# Altium PCB HGD(v0.1)-20200419.PcbDoc
Units mil, origin at the board's own origin, x right, y up, seen from the top; angles counter-clockwise.
Board outline 2630 x 3365 mil, 2 copper layers (TopLayer, BottomLayer); 74 components, 44 nets, 275 pads, 621 vias.
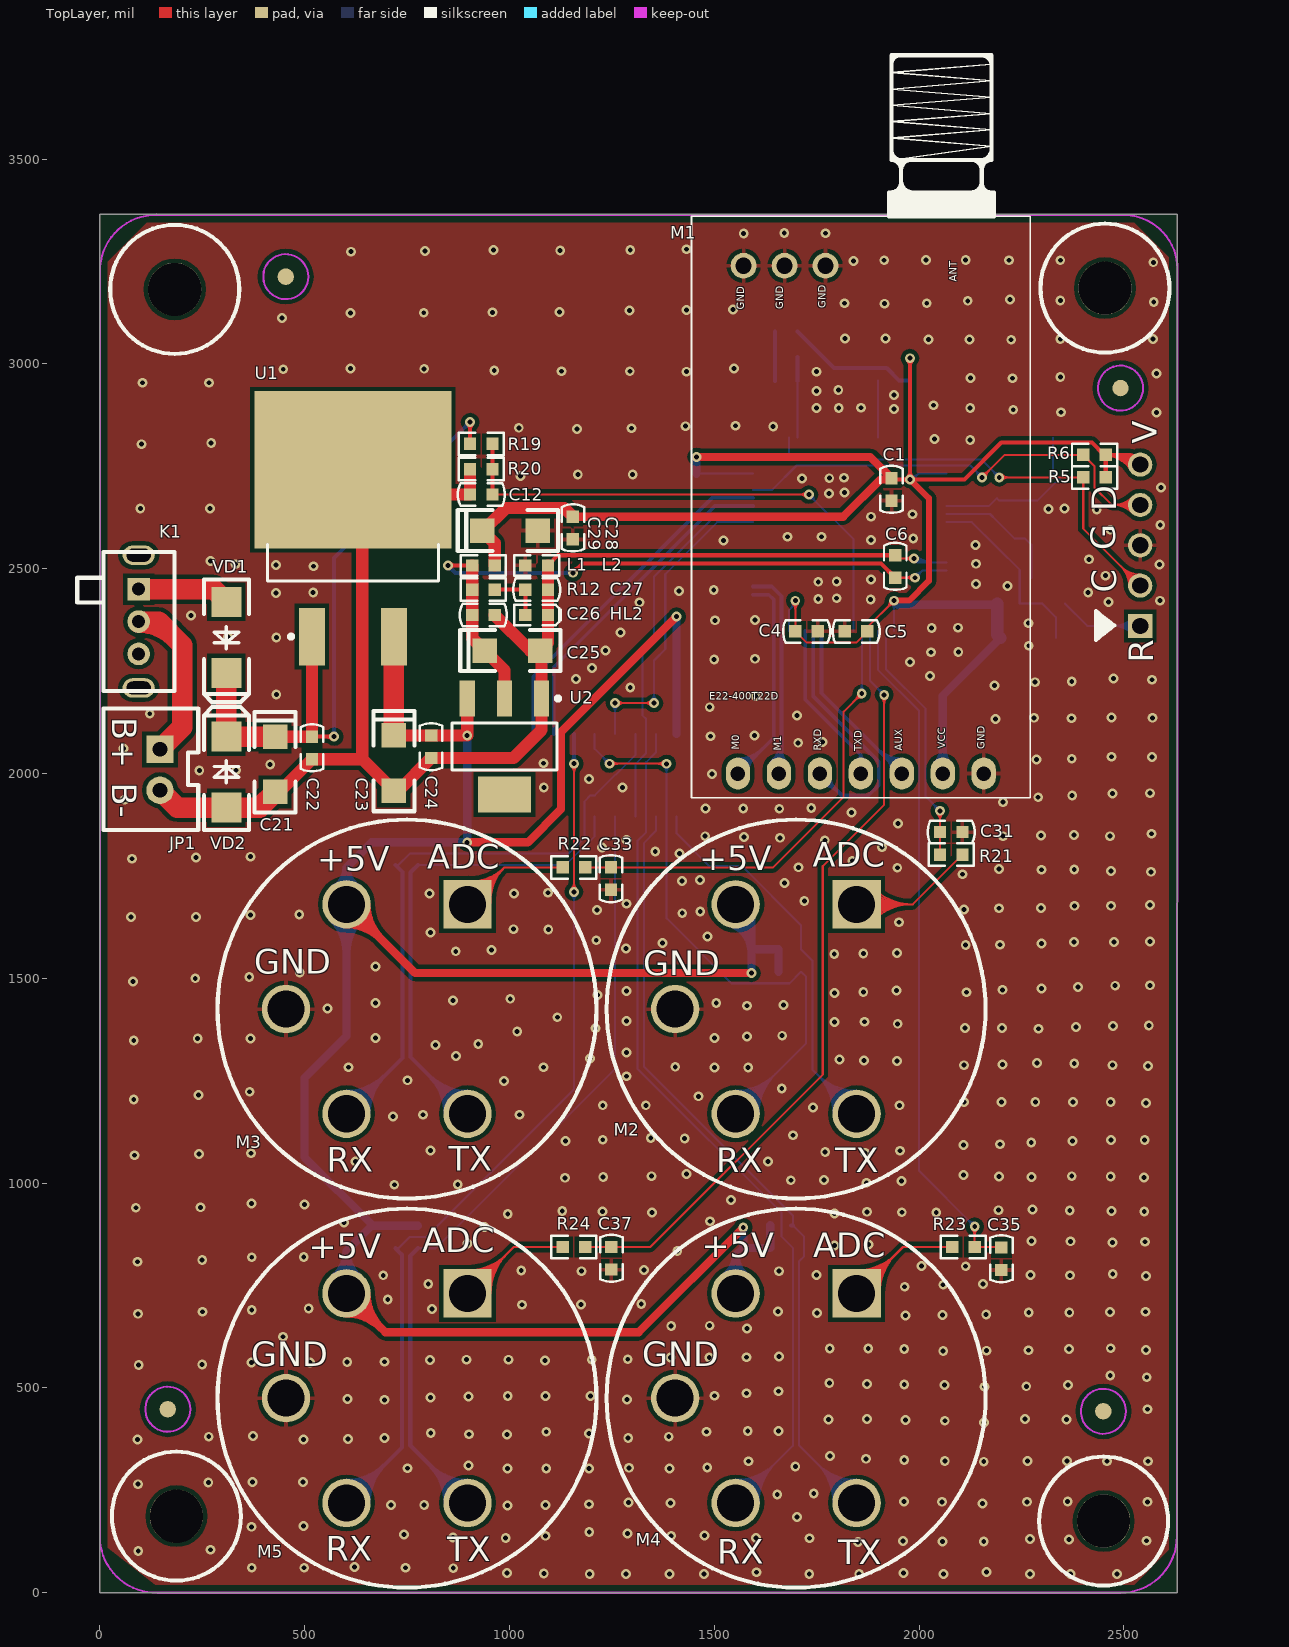
[diagram p0: TopLayer view]
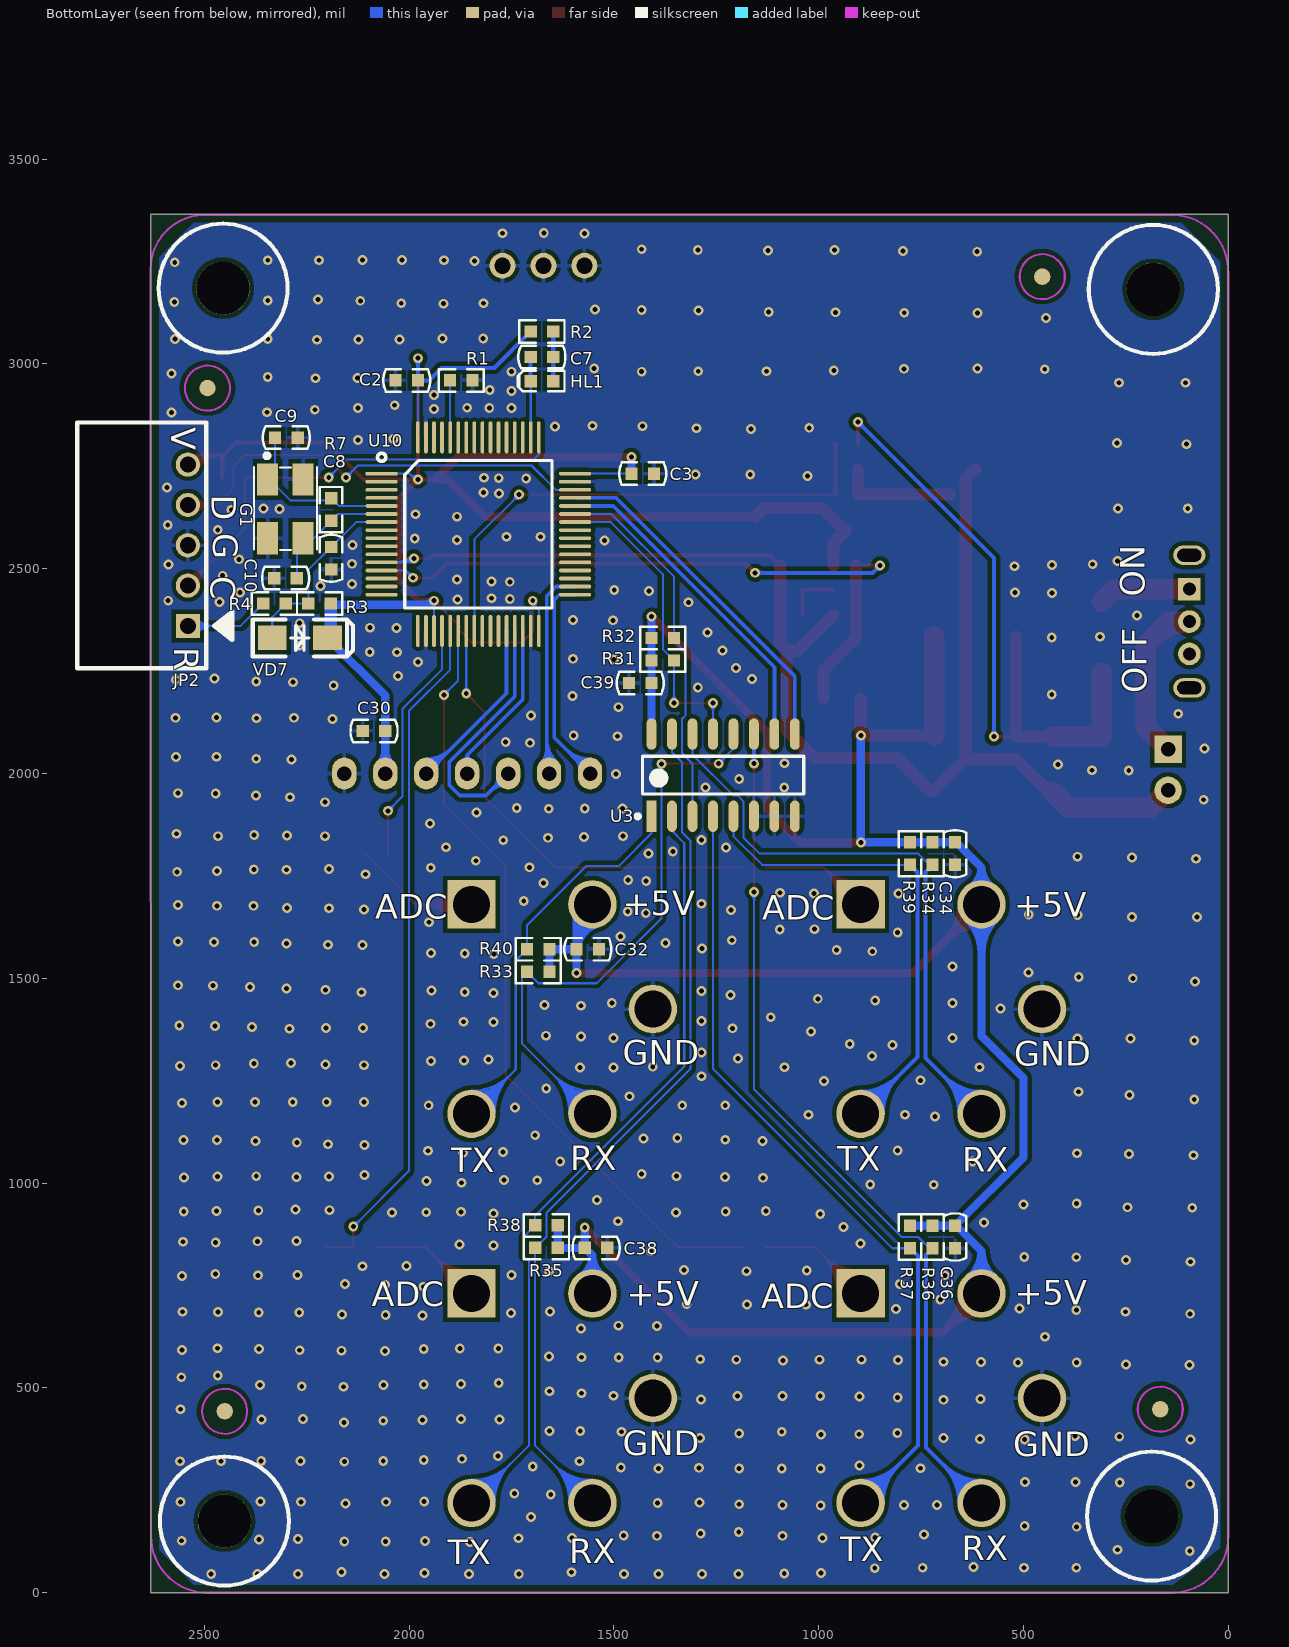
[diagram p1: BottomLayer view, seen from below]

## Layer stack, top to bottom
TopLayer: signal copper 1.4
Dielectric: core 12.6, FR-4, Dk 4.8
BottomLayer: signal copper 1.4

## Board outline
0,0 2630,0 2630,3360 2630,3365 0,3365 0,0

## Design rules (kind name [scope] priority, off if disabled: settings)
Clearance Clearance_2 [InNet('RF_IN') vs InNet('GND')] p1: gap=19.68
Clearance [All] p2: gap=10
Clearance Clearance_1 [All] p3: gap=10
ComponentClearance [All] p1 off: gap=10 collisioncheckmode=3 verticalgap=10 showdistances=FALSE
FabricationTestPointUsage TestPointUsage [All] p1: valid=0 allowmultiple=FALSE
FabricationTestpoint Testpoint [(IsPad And (OnTopLayer Or OnBottomLayer))] p1: side=3 testpointundercomponent=TRUE minsize=40 maxsize=100 preferedsize=60 minholesize=20 maxholesize=40 preferedholesize=32 testpointgrid=1 allowsidetop=TRUE allowsidebottom=TRUE usegrid=TRUE gridtolerance=0.01
HoleSize [All] p1: absolutevalues=TRUE maxlimit=200 minlimit=1 maxpercent=80.000 minpercent=20.000
PolygonConnect [IsVia] p1: connectstyle=Direct reliefconductorwidth=10 reliefentries=4 polygonreliefangle="90 Angle"
PolygonConnect PolygonConnect_via [All] p2 off: connectstyle=Relief reliefconductorwidth=10 reliefentries=4 polygonreliefangle="90 Angle"
RoutingVias [All] p1: holewidth=15.75 width=31.5 viastyle="Through Hole" minholewidth=11.81 minwidth=23.62 maxholewidth=19.68 maxwidth=39.37
ShortCircuit [All] p1 off: allowed=FALSE
SilkscreenOverComponentPads [All] p1: minsilkscreentomaskgap=10
SolderMaskExpansion [All] p1: expansion=4
Width [All] p1: maxlimit=100 minlimit=5 preferedwidth=10
22 further rules are at their usual default settings.

## Components (designator, comment, footprint, x,y, rotation, side; value= is the part's Value field where it differs from the comment)
C1 "100nF/25V/5%" C0603 1933,2666 r90 top
C2 "100nF/25V/5%" C0603 1978,2960 r0 bottom
C3 "100nF/25V/5%" C0603 1457,2732 r180 bottom
C4 "100nF/25V/5%" C0603 1753,2347 r180 top
C5 "100nF/25V/5%" C0603 1819,2347 r0 top
C6 "100nF/25V/5%" C0603 1942,2533 r270 top
C7 "100nF/25V/5%" C0603 1648,3017 r0 bottom
C8 "100nF/25V/5%" C0603 2190,2553 r270 bottom
C9 "20pF/25V/1%" C0603 2272,2820 r0 bottom
C10 "20pF/25V/1%" C0603 2274,2477 r0 bottom
C12 "100nF/25V/5%" C0603 959,2681 r180 top
C21 "10uF/25V/5%" C1206-1 428,2090 r270 top
C22 "100nF/25V/5%" C0603 518,2035 r90 top
C23 "10uF/25V/5%" C1206-1 718,2093 r270 top
C24 "100nF/25V/5%" C0603 809,2038 r90 top
C25 "10uF/25V/5%" C1206-1 940,2300 r0 top
C26 "100nF/25V/5%" C0603 964,2387 r180 top
C27 "100nF/25V/5%" C0603 1039,2449 r0 top
C28 "100nF/25V/5%" C0603 1155,2572 r90 top
C29 "10uF/25V/5%" C1206-1 934,2593 r0 top
C30 "100nF/25V/5%" C0603 2113,2104 r180 bottom
C31 "100nF/25V/5%" C0603 2051,1857 r0 top
C32 "100nF/25V/5%" C0603 1591,1571 r180 bottom
C33 "100nF/25V/5%" C0603 1248,1771 r270 top
C34 "100nF/25V/5%" C0603 667,1832 r270 bottom
C35 "100nF/25V/5%" C0603 2201,843 r270 top
C36 "100nF/25V/5%" C0603 667,896 r270 bottom
C37 "100nF/25V/5%" C0603 1249,844 r270 top
C38 "100nF/25V/5%" C0603 1571,842 r180 bottom
C39 "100nF/25V/5%" C0603 1408,2221 r0 bottom
G1 "16MHz" OSC5032 2345,2718 r270 bottom
HL1 "LED蓝灯" LED0603 1648,2958 r0 bottom
HL2 "LED蓝灯" LED0603 1039,2387 r0 top
JP1 "电池接口" XH2.54-LI-2P 147,2009 r270 top locked
JP2 "SWD" XH2.54-5AW 2540,2262 r90 bottom locked
K1 "电池开关" SK-12D07 95,2371 r270 top locked
L1 "10uH/5%" L0603 909,2508 r0 top
L2 "10uH/5%" L0603 1094,2508 r180 top
M1 "E22-400T22D" E22-400T22D 1558,2000 r90 top locked
M2 "JXM-O2" JXM 1700,1425 r90 top locked
M3 "JXM-CO" JXM 750,1425 r90 top locked
M4 "JXM-H2S" JXM 1700,475 r90 top locked
M5 "JXM-LEL" JXM 750,475 r90 top locked
R1 "10K/5%" R0603 1845,2960 r0 bottom
R2 "2K/5%" R0603 1703,3079 r180 bottom
R3 "10K/5%" R0603 2246,2415 r180 bottom
R4 "1K/5%" R0603 2356,2415 r180 bottom
R5 "10K/5%" R0603 2401,2723 r0 top
R6 "10K/5%" R0603 2401,2778 r0 top
R7 "1M/1%" R0603 2190,2672 r270 bottom
R12 "2K/5%" R0603 909,2449 r0 top
R19 "10M/1%" R0603 904,2805 r0 top
R20 "2.2M/1%" R0603 959,2743 r180 top
R21 "2K/5%" R0603 2051,1802 r0 top
R22 "2K/5%" R0603 1185,1771 r180 top
R23 "2K/5%" R0603 2136,844 r180 top
R24 "2K/5%" R0603 1185,844 r180 top
R31 "10K/5%" R0603 1353,2276 r0 bottom
R32 "10K/5%" R0603 1353,2331 r0 bottom
R33 "10K/5%" R0603 1712,1516 r180 bottom
R34 "10K/5%" R0603 722,1777 r90 bottom
R35 "10K/5%" R0603 1692,842 r180 bottom
R36 "10K/5%" R0603 722,841 r90 bottom
R37 "10K/5%" R0603 777,896 r270 bottom
R38 "10K/5%" R0603 1637,897 r0 bottom
R39 "10K/5%" R0603 777,1832 r270 bottom
R40 "10K/5%" R0603 1657,1571 r0 bottom
U1 "L7805CD2T" D2PAK 618,2588 r90 top locked
U2 "AMS1117-3.3" SOT230P700X180-4N 988,2066 r270 top locked
U3 "74HC4052" SO16_74HC4052 1233,1996 r90 bottom
U10 "STM32F105RCT6" LQFP64 2067,2732 r180 bottom locked
VD1 "1N5408" SMA_DO-214AC 309,2419 r270 top
VD2 "1N4007" SMA_DO-214AC 309,1917 r90 top
VD7 "1N4148" LL-34 2334,2331 r180 bottom

## Footprints (in the part's own frame and the unit in brackets; to place one, negate y for a bottom-side part, rotate by r counter-clockwise, add the part's x,y. Pads: shape width x height; smd on the part's side, far side on the other; paste and mask are expansions set on the pad)
C0603 [mil] "C0603封装电容"
  rect 30x30 smd: 1(0,0) 2(55,0)
  silkscreen extent -30,-28 85,28
C1206-1 [mil] "C1206封装钽电容"
  rect 60x60 smd: 1(0,0) 2(135,0)
  silkscreen extent -60,-50 185,50
D2PAK [mm] "D2-PAK, 3-Pads, Body 9.0x10.6mm (max), IPC Medium Density"
  rect 3.55x1.6 smd: 1(-6.45,2.54) 3(-6.45,-2.54)
  rect 9.75x12.2 smd: 2(3.9,0)
  silkscreen extent -6.57,-5.3 -0.75,5.3, body extent -3,-5.28 6,5.28, height 4.56
E22-400T22D [mm]
  oval 2x1.5 hole 0.9: 1(0,0) 2(0,-2.54) 3(0,-5.08) 4(0,-7.62) 5(0,-10.16) 6(0,-12.7) 7(0,-15.24)
  round 1.6 hole 1: 8(31.49,-5.43) 9(31.49,-2.89) 10(31.49,-0.35)
  silkscreen extent -1.51,-18.12 44.54,2.88
JXM [mm]
  rect 3x3 hole 2.3: 1(6.495,-3.75)
  round 3 hole 2.3: 2(6.495,3.75) 3(0,7.5) 4(-6.495,3.75) 5(-6.495,-3.75)
  silkscreen extent -11.75,-11.75 11.75,11.75
L0603 [mil] "L0603封装电感"
  rect 30x30 smd: 1(0,0) 2(55,0)
  silkscreen extent -28,-25 82,25
LED0603 [mil]
  rect 30x30 smd: A(0,0) K(55,0)
  silkscreen extent -28,-25 87,25
LL-34 [mil] "开关二极管LL-34封装"
  rect 70x60 smd: A(0,0) K(135,0)
  silkscreen extent -48,-45 198,45
LQFP64 [mm]
  rect 2x0.229 smd: 1(0,0)
  oval 2x0.229 smd: 2(0,-0.5) 3(0,-1) 4(0,-1.5) 5(0,-2) 6(0,-2.5) 7(0,-3) 8(0,-3.5) 9(0,-4) 10(0,-4.5) 11(0,-5) 12(0,-5.5) 13(0,-6) 14(0,-6.5) 15(0,-7) 16(0,-7.5) 33(12,-7.5) 34(12,-7) 35(12,-6.5) 36(12,-6) 37(12,-5.5) 38(12,-5) 39(12,-4.5) 40(12,-4) 41(12,-3.5) 42(12,-3) 43(12,-2.5) 44(12,-2) 45(12,-1.5) 46(12,-1) 47(12,-0.5) 48(12,0)
  oval 0.229x2 smd: 17(2.25,-9.75) 18(2.75,-9.75) 19(3.25,-9.75) 20(3.75,-9.75) 21(4.25,-9.75) 22(4.75,-9.75) 23(5.25,-9.75) 24(5.75,-9.75) 25(6.25,-9.75) 26(6.75,-9.75) 27(7.25,-9.75) 28(7.75,-9.75) 29(8.25,-9.75) 30(8.75,-9.75) 31(9.25,-9.75) 32(9.75,-9.75) 49(9.75,2.25) 50(9.25,2.25) 51(8.75,2.25) 52(8.25,2.25) 53(7.75,2.25) 54(7.25,2.25) 55(6.75,2.25) 56(6.25,2.25) 57(5.75,2.25) 58(5.25,2.25) 59(4.75,2.25) 60(4.25,2.25) 61(3.75,2.25) 62(3.25,2.25) 63(2.75,2.25) 64(2.25,2.25)
  silkscreen extent -0.25,-8.32 10.57,1.27
OSC5032 [mm]
  rect 2x1.3 smd: 1(0,0) 2(3.65,0) 3(3.65,2.2) 4(0,2.2)
  silkscreen extent -1.62,-0.84 4.37,3.05
R0603 [mil]
  rect 30x30 smd: 1(0,0) 2(55,0)
  silkscreen extent -28,-28 82,28
SK-12D07 [mm] "3脚2档小型拨动开关"
  oval 1.2x2 hole 0.8 slot 1.5 at 90 deg: 0(-4.115,0) 0(4.115,0)
  rect 1.4x1.4 hole 0.8: 1(-2.007,0)
  round 1.4 hole 0.8: 2(0,0) 3(2.007,0)
  silkscreen extent -4.32,-3.81 4.32,2.21
SMA_DO-214AC [mm]
  rect 1.85x1.85 smd: A(0,0) K(4.4,0)
  silkscreen extent -1.4,-1.4 6.22,1.4
SO16_74HC4052 [mm] "SOP, 16-Leads, Body 10.0x4.0mm (max), Pitch 1.27mm, IPC Medium Density"
  rect 1.95x0.6 smd: 1(-2.55,4.445)
  oval 1.95x0.6 smd: 2(-2.55,3.175) 3(-2.55,1.905) 4(-2.55,0.635) 5(-2.55,-0.635) 6(-2.55,-1.905) 7(-2.55,-3.175) 8(-2.55,-4.445) 9(2.55,-4.445) 10(2.55,-3.175) 11(2.55,-1.905) 12(2.55,-0.635) 13(2.55,0.635) 14(2.55,1.905) 15(2.55,3.175) 16(2.55,4.445)
  silkscreen extent -2.67,-5 1.17,5.42, body extent -2,-5 2,5, height 1.75
SOT230P700X180-4N [mm] "SOT223, 4-Leads, Body 6.5x7.3mm (max), Pitch 2.30mm, IPC Medium Density"
  rect 2.25x0.95 smd: 1(-2.975,2.3) 2(-2.975,0) 3(-2.975,-2.3)
  rect 2.25x3.3 smd: 4(2.975,0)
  silkscreen extent -3.1,-3.25 1.45,3.45, body extent -1.9,-3.25 1.9,3.25, height 1.8
XH2.54-5AW [mm] "XH2.54-5P弯针插座"
  rect 1.5x1.5 hole 1: 1(2.5,0)
  round 1.5 hole 1: 2(5,0) 3(7.5,0) 4(10,0) 5(12.5,0)
  silkscreen extent -0.13,-2.75 15.1,6.86
XH2.54-LI-2P [mm]
  rect 1.7x1.7 hole 0.9: 1(-1.27,0)
  round 1.7 hole 0.9: 2(1.27,0)
  silkscreen extent -3.81,-3.51 3.74,2.37, body extent -3.77,-3.3 3.77,2.4, height 7.05

## Part data
C1 C2 C3 C4 C5 C6 C8: library part CAP-SMD, "电容"
C7 C9 C10 C27 C28 C31 C32 C33 C34 C35 C36 C37 C38 C39: library part CAP, "电容"
C12: library part CAP-SMD
C21 C23 C25: library part "Cap Pol1", "钽电容"
C22 C24 C26 C30: library part Cap, "电容"
C29: library part ELECTRO1, "钽电容"
G1: library part CRYSTAL_4, "两对电极压电晶体"
HL1 HL2: library part 发光二极管, "发光二极管"
JP1: library part XH2.54-2P/PH2.0-2P, "XH2.54-2P/PH2.0-2P插座"
JP2: library part JP_XH2.54-5AW, "XH2.54-5P直插插针"
K1: library part SK-12D07, "SK-12D07：3脚2档小型拨动开关"
L1 L2: library part 电感, "电感"
M1: "E22-400T22D LoRa模块"
M2 M3 M4 M5: library part JXM, "JXM智能气体模组传感器"
R1 R2 R3 R4 R5 R6 R7 R12 R19 R20 R21 R22 R23 R24 R31 R32 R33 R34 R35 R36 R37 R38 R39 R40: library part RES2, "电阻"
U1: "Positive voltage regulator"
U2: library part U_AMS1117, "U_AMS1117稳压芯片"
U10: library part STM32F103RCT6, "MCU"
VD1 VD2 VD7: library part 开关二极管, "开关二极管"

## Free pads (board coordinates)
  round 40 smd far side: 0(166,448) 0(454,3213) 0(2450,443) 0(2492,2941)
  round 129.92 hole 129.92: 0(183,3182) 0(187.01,187.01) 0(2450.68,175.01) 0(2454,3185)
  round 40 smd: 1(166,448) 1(454,3213) 1(2450,443) 1(2492,2941)
  round 100 on Bottom Solder: 2(166,448) 2(454,3213) 2(2450,443) 2(2492,2941)
  round 100 on Top Solder: 3(166,448) 3(454,3213) 3(2450,443) 3(2492,2941)

## Via types
v1: diameter 24, hole 12, TopLayer to BottomLayer, tented both sides, 621 vias

## Nets (pads, with @x,y where several pads share a name; then routed paths per layer and width w, separated by ;. In a path a pad name is that pad's centre, name@x,y a point inside that pad or via, vN(x,y) a via of type N, cw(c..) or ccw(c..) an arc to the next point about the centre after c; other vN are vias at no path point)
3V3: C1.2 C2.1 C3.1 C4.2 C5.2 C28.2 C29.1 C30.2 JP2.5 L1.2 M1.6 R2.1 R3.2 R5.2 R6.2 U10.1 U10.19 U10.32 U10.48 U10.64 VD7.K | length 5744.5
  TopLayer w5: v1@1691.28,2415.28 cw(c1675.07,2399.07) 1698,2399.07 cw(c1720.93,2399.07) v1@1704.72,2415.28 ; v1(1698,2422) C4.2 1725.5,2319.5 1846.5,2319.5 C5.2 ; C5.2@1874,2357 v1(1939,2422) ; v1@1929.5,2422 cw(c1906.56,2422) 1922.78,2405.78 cw(c1939,2389.57) v1@1939,2412.5
  TopLayer w10: C1.2@1936,2718 v1(1978,2718) ; v1@1973.05,2713.05 ccw(c1961.1,2701.1) 1961.1,2718 ccw(c1961.1,2734.9) 1973.05,2722.95 ccw(c1961.1,2734.9) 1978,2734.9 ccw(c1994.9,2734.9) 1982.95,2722.95 ccw(c1994.9,2734.9) 1994.9,2718 ccw(c1994.9,2701.1) v1@1982.95,2713.05 ; v1@1973.05,3009.05 cw(c1961.1,2997.1) 1978,2997.1 cw(c1994.9,2997.1) v1@1982.95,3009.05 ; v1(1978,3014) v1(1978,2718) ; R5.2 R6.2 ; 2473.36,2778 cw(c2473.36,2715.5) JP2.5@2527.43,2746.84 ; 2490.71,2778 cw(c2490.71,2725.56) JP2.5@2536.08,2751.86 ; 2508.07,2778 cw(c2508.07,2735.62) JP2.5@2544.73,2756.87 ; JP2.5@2518.78,2741.83 ccw(c2456,2705.44) R6.2 ; JP2.5 2516.13,2778 R6.2 ; v1(1978,2718) 2110.82,2718 2200.82,2808 2422.21,2808 2452.21,2778 R6.2
  TopLayer w15: v1(1939,2422) 1975.72,2422 2024,2470.28 2024,2672 v1(1978,2718)
  TopLayer w20: C28.2 1815,2627 1906,2718 C1.2@1926.72,2718 ; v1(1457,2773) 1881,2773 C1.2 1929.72,2721 C1.2@1926.72,2718 ; C1.2@1936,2718 C1.2@1926.72,2718
  TopLayer w30: L1.2 964,2563 C29.1 936.36,2593 991.36,2648 1134,2648 C28.2
  BottomLayer w5: C3.1 U10.48 ; U10.32 1683.14,2399 1698,2413.86 v1(1698,2422) ; 1687.21,2403.07 ccw(c1678.31,2411.98) v1@1689.53,2417.69 ; 1692.08,2407.94 ccw(c1684.76,2415.26) v1@1693.99,2419.96 ; v1@1932.28,2415.28 cw(c1915.95,2398.95) 1939.05,2398.95 ; U10.19 v1(1939,2422) ; 1939.05,2399.18 cw(c1961.82,2399.18) v1@1945.72,2415.28 ; v1(1978,2718) 1985,2718 1999,2732 ; C2.1 1978.42,2959.58 U10.64 ; v1@1979.21,2722.34 ccw(c1982.99,2735.9) 1992.94,2725.94 ; v1@1980.55,2727.15 ccw(c1985.62,2745.38) 1999,2732 ; v1@1987.5,2718 cw(c1993.54,2718) 1989.27,2722.27 ; U10.1 1999,2732
  BottomLayer w10: R2.1 1792,2990 1921.21,2990 1951.21,2960 C2.1 v1(1978,3014) ; v1@1973.05,3009.05 cw(c1961.1,2997.1) 1978,2997.1 cw(c1994.9,2997.1) v1@1982.95,3009.05
  BottomLayer w20: C3.1 v1(1457,2773) ; v1@1940.41,2423.41 ccw(c1967.43,2450.43) 1967.43,2412.23 ; 1948.77,2412.23 2188.23,2412.23 R3.2 ; M1.6@2044.19,2023.65 ccw(c2010.86,2056.99) 2058,2056.99 ccw(c2105.14,2056.99) M1.6@2071.81,2023.65 ; M1.6 C30.2 2058,2190 VD7.K
  BottomLayer w30: R3.2 2191,2339 VD7.K
3V3A: C6.2 C25.1 C26.2 L1.1 R12.1 U2.2 U10.13 | length 1850.7
  TopLayer w5: C6.2 v1(1990,2478) ; v1@1983.28,2471.28 ccw(c1967.06,2455.07) 1967.06,2478 ccw(c1967.06,2500.93) v1@1983.28,2484.72
  TopLayer w10: v1(850,2508) L1.1 ; v1@854.95,2503.05 cw(c866.9,2491.1) 866.9,2508 cw(c866.9,2524.9) v1@854.95,2512.95 ; v1(1155,2490) 1178,2513 1907,2513 C6.2 ; v1@1155,2497 ccw(c1155,2513.9) 1166.95,2501.95 ccw(c1178.9,2490) v1@1162,2490
  TopLayer w30: L1.1 R12.1 C26.2 909,2331 C25.1 988,2252 U2.2
  BottomLayer w5: v1(1990,2478) 2007.78,2495.78 U10.13 ; v1@1990,2487.5 ccw(c1990,2510.43) 2006.22,2494.22 ccw(c2022.44,2478) v1@1999.5,2478
  BottomLayer w10: v1@850,2501 cw(c850,2484.1) 861.95,2496.05 cw(c873.9,2508) v1@857,2508 ; v1(850,2508) 868,2490 v1(1155,2490) ; v1@1150.05,2485.05 ccw(c1138.1,2473.1) 1138.1,2490 ccw(c1138.1,2506.9) v1@1150.05,2494.95
+5V: C23.1 C24.2 C32.1 C34.1 C36.1 C38.1 C39.1 M2.2 M3.2 M4.2 M5.2 R31.2 R32.2 R33.2 R34.2 R35.2 R36.2 R37.1 R38.1 R39.1 R40.1 U1.3 U2.3 U3.16 | length 8043
  TopLayer w20: M5.2@602.36,681.66 cw(c602.36,563.23) 686.1,646.97 cw(c769.85,730.72) M5.2@651.42,730.72 ; M5.2@602.36,701.66 cw(c602.36,631.52) 651.96,681.12 cw(c701.56,730.72) M5.2@631.42,730.72 ; M5.2 697.08,636 1315,636 ; M3.2@602.36,1631.66 cw(c602.36,1513.23) 686.1,1596.97 cw(c769.85,1680.72) M3.2@651.42,1680.72 ; M3.2@602.36,1651.66 cw(c602.36,1581.52) 651.96,1631.12 cw(c701.56,1680.72) M3.2@631.42,1680.72 ; M3.2 770.08,1513 v1(1591,1513) ; v1(897,1832) 1045,1832 1126,1913 1126,2101 v1(1408,2383) ; 1316,636 1315,636 ; v1(1571,892) 1315,636
  TopLayer w30: C23.1 C24.2 v1(897,2093) 897.45,2093.45 U2.3
  TopLayer w50: C23.1 U1.3
  BottomLayer w20: M3.2@567.68,1646.03 cw(c483.93,1562.29) 602.36,1562.29 cw(c720.79,1562.29) M3.2@637.05,1646.03 ; M5.2@571.18,768.59 ccw(c516.81,834.64) 602.36,834.64 ; M3.2@575.81,1721.96 ccw(c544.46,1770.64) 602.36,1770.64 ; M3.2@581.82,1660.17 cw(c532.22,1610.57) 602.36,1610.57 cw(c672.51,1610.57) M3.2@622.91,1660.17 ; M5.2@583.9,753.15 ccw(c551.69,792.27) 602.36,792.27 ccw(c653.04,792.27) M5.2@620.83,753.15 ; M5.2 602.36,834.65 ; M3.2@628.92,1721.96 cw(c660.26,1770.64) 602.36,1770.64 ; M5.2@633.54,768.59 cw(c687.92,834.64) 602.36,834.64 ; R37.1 R36.2 C36.1 ; 897,1952 v1(897,2093) v1(897,1832) R39.1 R34.2 C34.1 663.72,1832 602.36,1770.65 ; U3.16 C39.1 R31.2 R32.2 v1(1408,2383) ; M4.2@1524.79,771.29 ccw(c1489.41,823.36) 1552.36,823.36 ; M2.2@1538.86,1633.56 cw(c1519.07,1564.4) C32.1@1591,1564.4 ; M2.2@1544.37,1652.78 cw(c1526.66,1590.93) 1591,1590.93 ; M2.2@1549.87,1672.01 cw(c1534.25,1617.46) 1591,1617.46 ; M4.2 1552.36,823.36 ; M2.2 1591,1642.08 C32.1 ; v1(1571,892) C38.1 ; M4.2@1579.93,771.29 cw(c1615.31,823.36) 1552.36,823.36 ; v1(1591,1513) C32.1 ; R38.1 R35.2 C38.1 ; R33.2 R40.1 C32.1 ; 602.36,834.65 663.72,896 C36.1 ; 602.36,1770.65 M3.2 602.36,1359.36 500,1257 500,1063 C36.1 ; 1552.36,823.36 C38.1
AGND: C6.1 C12.2 C21.2 C22.1 C23.2 C24.1 C25.2 C26.1 C27.2 HL2.K JP1.2 L2.1 R20.2 U1.2 U2.1 U10.12 VD2.A | length 3797.7
  TopLayer w5: C6.1 1950,2525 v1(1988,2525) ; v1@1981.28,2518.28 ccw(c1965.06,2502.07) 1965.06,2525 ccw(c1965.06,2547.93) v1@1981.28,2531.72
  TopLayer w10: L2.1 1119,2533 C6.1
  TopLayer w30: C21.2 C21.2@438,1955 ; C21.2@439,1955 C21.2@438,1955 ; U1.2 641,2718.54 641,2035 ; U1.2@678.54,2681 C12.2 R20.2 ; C26.1 1051,2300 C25.2 ; L2.1 C27.2 HL2.K 1094,2319 C25.2 ; C21.2@438,1955 C22.1 641,2035 ; 641,2035 C23.2 729,1958 C24.1 1010,2038 1078.55,2106.55 U2.1 1078.55,2296.45 C25.2
  TopLayer w50: JP1.2 189,1917 VD2.A 390,1917 C21.2
  BottomLayer w5: v1@1984.11,2521.11 ccw(c1997.74,2534.74) 1997.74,2515.47 ; v1@1987.65,2524.65 ccw(c2009.81,2546.81) 2009.81,2515.47 ; v1(1988,2525) 1997.53,2515.47 U10.12 ; v1@1991.18,2528.18 ccw(c2021.88,2558.88) 2021.88,2515.47 ; v1@1994.72,2531.72 ccw(c2033.95,2570.95) U10.12@2033.95,2515.47
B_VOLT_ADC: C12.1 R19.2 R20.1 U10.24 | length 1346.5
  TopLayer w5: C12.1 v1(1731.25,2681) ; v1@1724.53,2674.28 ccw(c1708.31,2658.07) 1708.31,2681 ccw(c1708.31,2703.93) v1@1724.53,2687.72
  TopLayer w10: C12.1 R20.1 R19.2
  BottomLayer w5: v1@1731.25,2671.5 cw(c1731.25,2648.57) 1747.46,2664.78 cw(c1763.68,2681) v1@1740.74,2681 ; v1(1731.25,2681) 1840.62,2571.62 U10.24
BATT+: JP1.1 K1.2 | length 584.6
  TopLayer w50: K1.2@95,2368.44 cw(c95,2243.97) 183.02,2331.98 ; K1.2 144,2371 201.5,2313.5 201.5,2113.5 JP1.1 ; K1.2@95.51,2368.49 cw(c111.53,2289.53) 168.5,2346.5
BOOT0: R1.2 U10.60 | length 139.1
  BottomLayer w5: U10.60 R1.2@1899.68,2959.68
DGND: C1.1 C2.2 C3.2 C4.1 C5.1 C8.2 C9.1 C10.2 C28.1 C29.2 C30.1 C31.2 C32.2 C33.2 C34.2 C35.2 C36.2 C37.2 C38.2 C39.2 G1.2 G1.4 JP2.3 L2.2 M1.7 M1.8 M1.9 M1.10 M2.3 M3.3 M4.3 M5.3 R1.1 U3.6 U3.7 U3.8 U10.18 U10.31 U10.47 U10.63
  other v1: 1196,46 1285,46 1391,46 1475,46 1732,46 1854,46 2060,46 2271,46 2370,46 2483,46 1084,47 994,48 1962,48 1603,50 2165,51 863,60 371,61 499,61 746,61 622,63 94,102 270,105 1851,124 2057,125 2158,125 1961,126 2555,127 2366,130 2271,131 1733,133 991,134 1602,134 862,135 1088,139 1395,139 1476,140 743,142 1288,145 1195,148 370,161 497,163 1702,185 995,213 711,214 792,214 1088,214 1194,216 2155,218 1393,219 1291,220 2056,222 2264,222 2558,222 1963,223 2363,223 1654,240 1743,242 93,265 265,269 373,270 496,270 995,303 1090,303 1194,303 1391,303 751,304 1292,305 1483,306 1698,308 900,311 2158,320 1584,321 2459,321 2559,321 2063,322 2265,322 2361,322 1964,324 1871,327 1783,334 92,374 497,374 606,375 695,378 1290,378 266,381 1389,381 374,383 994,386 901,387 1194,389 808,390 1090,393 1481,393 1582,395 1657,395 2159,416 2063,420 1967,422 1779,423 2360,423 1873,424 2259,424 2558,448 695,471 1287,472 605,473 807,477 900,479 996,480 1088,480 1198,480 1501,481 1579,487 1657,492 2160,503 2262,504 2062,507 2364,507 1964,508 1873,510 1781,512 2556,526 2467,530 95,556 250,557 370,562 513,562 604,563 695,564 1087,567 806,568 895,569 998,569 1201,569 1289,570 1393,574 1488,574 1579,575 1658,577 2059,590 2165,591 2267,592 2554,593 1964,595 2366,595 1782,596 1876,596 2468,597 447,625 1580,645 1395,651 1489,652 1967,677 2057,678 2164,679 93,681 1751,683 2268,684 2367,684 2466,685 251,686 2553,686 1656,687 371,690 811,693 510,694 1031,703 1175,704 1322,705 703,716 1965,747 2059,752 802,754 2156,754 2554,773 692,775 2369,775 1750,776 2272,776 2473,778 1176,785 1658,785 1029,787 1329,788 2114,797 2006,798 92,808 250,812 371,819 498,820 1410,834 1794,848 1877,850 898,853 2472,855 2552,857 2370,858 2275,859 939,893 596,904 1490,907 996,925 1794,926 1348,928 2042,928 1958,929 1873,930 1227,931 2550,931 1129,932 2470,932 2368,933 2194,934 2277,936 88,940 246,941 500,948 370,950 1541,959 719,996 874,997 1872,1001 1957,1005 1687,1007 1768,1008 1136,1013 2549,1014 1229,1015 2275,1015 2195,1016 2468,1016 1347,1017 2373,1017 2109,1020 1432,1022 624,1053 1631,1053 85,1068 242,1071 369,1073 1868,1074 1771,1076 1954,1079 807,1080 2109,1093 2198,1095 2274,1099 1137,1103 2375,1103 2469,1105 2551,1105 1228,1106 1428,1109 1345,1110 1692,1117 716,1163 789,1167 1025,1167 1741,1185 1228,1190 1333,1190 1952,1190 2554,1196 2110,1198 2201,1198 2284,1198 2376,1198 2468,1198 83,1204 1462,1212 241,1215 366,1223 1665,1231 987,1249 751,1251 1286,1261 1501,1282 1583,1282 607,1283 1083,1283 1405,1284 2559,1286 2110,1288 2472,1288 2204,1290 2379,1292 2288,1293 1946,1298 1866,1299 1806,1302 1197,1304 870,1310 1286,1319 820,1337 924,1340 83,1348 239,1353 368,1353 673,1354 1501,1354 1580,1358 1666,1360 1019,1370 2292,1377 1210,1378 2112,1379 2203,1379 2383,1381 2474,1384 2561,1385 1948,1389 1794,1393 1867,1394 1286,1396 1117,1405 556,1426 1580,1433 1669,1435 673,1440 1505,1440 862,1446 1002,1450 1215,1459 1794,1464 2116,1466 1864,1467 1286,1469 1945,1470 2204,1472 2299,1475 2388,1479 2479,1482 2564,1483 81,1492 233,1500 365,1503 488,1514 673,1529 1793,1559 1864,1561 1946,1562 869,1566 956,1569 1285,1573 2114,1581 2198,1582 2299,1585 1374,1586 2378,1589 2476,1589 2564,1590 1212,1593 1484,1602 807,1612 1095,1619 1010,1620 1951,1637 76,1650 235,1650 368,1655 487,1656 1422,1659 1466,1663 1214,1667 2110,1668 2195,1671 2298,1672 2380,1677 2469,1677 2564,1679 1286,1682 1720,1689 805,1707 1011,1707 1094,1709 1672,1733 1421,1738 1465,1740 2106,1754 2566,1760 2469,1762 2299,1765 2379,1766 2195,1767 1947,1770 1706,1771 1837,1787 79,1792 235,1795 368,1797 1415,1805 1356,1810 1226,1819 1910,1820 1770,1837 1286,1838 1661,1843 1573,1845 1478,1847 2205,1847 2466,1847 2298,1849 2378,1850 2568,1853 1949,1878 1835,1905 1659,1914 1479,1915 1571,1915 1737,1916 2205,1930 60,1936 2291,1942 2374,1946 2472,1951 2564,1952 1084,1966 1276,1966 1194,1987 1495,1999 243,2007 333,2008 416,2022 1083,2025 2287,2034 2373,2036 2569,2040 2470,2041 58,2061 1705,2075 1764,2077 1491,2091 1598,2093 2187,2133 2372,2135 2281,2136 2570,2136 2470,2137 1702,2142 122,2146 1489,2162 1601,2189 431,2193 1295,2210 2184,2215 2283,2223 2373,2225 2569,2229 1163,2231 2475,2232 2027,2238 1202,2258 1978,2272 1500,2278 1600,2280 2029,2296 2096,2297 1235,2300 2268,2312 431,2332 313,2334 1271,2344 2031,2355 2095,2356 2267,2367 1502,2374 1600,2375 223,2386 1318,2418 2463,2419 2588,2422 1882,2425 1754,2426 1799,2428 430,2441 521,2442 2413,2442 1414,2446 1499,2448 2216,2458 2139,2463 1754,2468 1799,2469 1883,2474 2455,2483 522,2506 430,2509 2587,2510 331,2511 2139,2512 270,2519 2415,2523 2138,2558 1523,2569 1883,2570 1986,2574 1679,2578 1762,2578 2467,2595 2589,2607 1883,2627 1984,2633 2434,2644 2316,2646 99,2647 269,2647 2355,2647 1780,2684 1818,2686 2591,2698 1714,2720 1781,2721 1817,2722 1027,2726 1167,2730 1301,2730 102,2804 272,2807 2125,2814 2038,2817 1165,2841 1298,2843 1023,2844 1644,2847 1430,2848 1552,2849 2580,2881 2347,2882 2230,2888 1939,2890 1750,2892 1804,2892 2125,2892 1858,2893 2035,2899 1939,2924 1750,2934 1803,2936 104,2954 267,2954 2228,2965 2126,2966 2345,2968 2580,2977 1432,2981 1750,2981 1127,2982 1294,2982 963,2984 448,2987 792,2988 612,2989 1548,2989 2225,3059 2023,3060 2123,3060 2345,3061 2571,3061 1819,3062 1918,3062 445,3112 612,3124 791,3125 959,3126 1122,3127 1293,3130 1432,3132 1546,3133 1916,3147 1818,3148 2019,3148 2573,3151 2119,3154 2345,3155 2222,3157 2572,3248 1840,3251 1915,3253 2220,3253 2345,3253 2017,3254 2114,3254 613,3274 794,3276 1124,3277 961,3278 1295,3278 1432,3280 1572,3318 1772,3319 1671,3320
E22_AUX: M1.5 U10.28 | length 606.4
  BottomLayer w9: U10.28 1761.88,2196.12 M1.5 M1.5@1956.98,2000 ; 1898.47,2059.53 ccw(c1958,2119.05) M1.5@1958,2034.87 ; 1913.84,2044.16 ccw(c1958,2088.33) M1.5@1958,2025.87 ; 1922.24,2035.76 cw(c1896.31,2009.84) M1.5@1932.97,2009.84 ; 1929.2,2028.8 ccw(c1958,2057.6) M1.5@1958,2016.87
E22_RX: M1.4 U10.30 | length 435.1
  BottomLayer w9: U10.30 1722.51,2180.72 1858,2045.24 ; M1.4@1849.66,2033.44 ccw(c1845.49,2045.24) 1858,2045.24 ; M1.4 1858,2045.24 ; M1.4@1866.34,2033.44 cw(c1870.51,2045.24) 1858,2045.24
E22_TX: M1.3 U10.29 | length 728
  BottomLayer w9: U10.29 1742.2,2187.91 1902.03,2028.08 1902.03,1971.92 1876.24,1946.13 1811.87,1946.13 M1.3 ; M1.3@1758.07,1983.13 cw(c1758.45,1943.5) 1786.48,1971.52 ; M1.3@1758.16,1974.13 cw(c1758.74,1913.48) 1801.63,1956.37 ; M1.3@1783.03,1990.16 ccw(c1819.69,1990.16) 1793.76,1964.24
JXM_CO_ADC: C33.1 R22.1 U10.23 | length 1197.6
  TopLayer w5: R22.1 C33.1 1643.72,1771 1815.97,1943.25 1815.97,2150.97 v1(1860.31,2195.31) ; v1@1850.81,2195.31 cw(c1827.87,2195.31) 1844.09,2179.09 cw(c1860.31,2162.87) v1@1860.31,2185.81
  BottomLayer w5: v1@1853.59,2202.03 ccw(c1837.37,2218.24) 1860.31,2218.24 ccw(c1883.24,2218.24) v1@1867.03,2202.03 ; v1(1860.31,2195.31) U10.23
JXM_CO_RX: M3.5 R39.2 U3.5 | length 1682.4
  BottomLayer w5: R39.2 1138,1777 1208,1847 U3.5
  BottomLayer w10: R39.2 759,1759 759,1307.92 M3.5 ; M3.5@843.58,1169.28 ccw(c713.08,1169.28) 805.36,1261.56 ccw(c897.64,1353.84) M3.5@897.64,1223.34 ; M3.5@853.58,1169.28 ccw(c747.22,1169.28) 822.43,1244.49 ccw(c897.64,1319.7) M3.5@897.64,1213.34 ; M3.5@863.58,1169.28 ccw(c781.37,1169.28) 839.5,1227.42 ccw(c897.64,1285.56) M3.5@897.64,1203.34
JXM_CO_TX: M3.4 R34.1 U3.14 | length 1972.1
  BottomLayer w5: R34.1 729.32,1777 756.82,1804.5 1144.29,1804.5 1183.69,1843.9 1183.69,1932.25 1197.93,1946.49 1208.49,1946.49 1308,2046 U3.14
  BottomLayer w10: M3.4 739,1305.92 739,1760 R34.1 ; M3.4@602.36,1203.34 ccw(c602.36,1285.56) 660.5,1227.42 ccw(c718.63,1169.28) M3.4@636.42,1169.28 ; M3.4@602.36,1213.34 ccw(c602.36,1319.7) 677.57,1244.49 ccw(c752.78,1169.28) M3.4@646.42,1169.28 ; M3.4@602.36,1223.34 ccw(c602.36,1353.84) 694.64,1261.56 ccw(c786.92,1169.28) M3.4@656.42,1169.28
JXM_H2S_ADC: C35.1 R23.1 U10.21 | length 1739.5
  TopLayer w5: v1@2129.28,887.28 cw(c2113.06,871.07) 2136,871.07 cw(c2158.94,871.07) v1@2142.72,887.28 ; v1(2136,894) R23.1 2200,844 C35.1
  BottomLayer w5: U10.21 1899.68,2253.47 2000.03,2153.12 2000.03,1029.97 v1(2136,894) ; v1@2126.5,894 ccw(c2103.56,894) 2119.78,910.22 ccw(c2136,926.43) v1@2136,903.5
JXM_H2S_RX: M4.5 R38.2 U3.2 | length 3021.1
  BottomLayer w5: U3.2 1358,1859.83 1328.17,1830 1328.17,1284.83 1692,921 R38.2 1719.5,869.5 1719.5,821.82 1707,809.32 1707,359.92 M4.5 ; M4.5@1791.08,219.28 ccw(c1654.55,219.28) 1751.09,315.83 ccw(c1847.64,412.38) M4.5@1847.64,275.84 ; M4.5@1796.08,219.28 ccw(c1671.62,219.28) 1759.63,307.29 ccw(c1847.64,395.3) M4.5@1847.64,270.84 ; M4.5@1801.08,219.28 ccw(c1688.69,219.28) 1768.16,298.76 ccw(c1847.64,378.23) M4.5@1847.64,265.84 ; M4.5@1806.08,219.28 ccw(c1705.76,219.28) 1776.7,290.22 ccw(c1847.64,361.16) M4.5@1847.64,260.84 ; M4.5@1811.08,219.28 ccw(c1722.83,219.28) 1785.23,281.69 ccw(c1847.64,344.09) M4.5@1847.64,255.84 ; M4.5@1816.08,219.28 ccw(c1739.9,219.28) 1793.77,273.15 ccw(c1847.64,327.02) M4.5@1847.64,250.84 ; M4.5@1821.08,219.28 ccw(c1756.97,219.28) 1802.31,264.62 ccw(c1847.64,309.95) M4.5@1847.64,245.84
  BottomLayer w10: R38.2@1688.21,897 R38.2
JXM_H2S_TX: M4.4 R35.1 U3.15 | length 3213.5
  BottomLayer w5: U3.15 1358,2052 1333.69,2027.69 1333.69,1857 1313.17,1836.48 1313.17,1278.62 1664.5,927.29 1664.5,869.5 R35.1 1692,358.92 M4.4 ; M4.4@1552.36,245.84 ccw(c1552.36,309.95) 1597.69,264.62 ccw(c1643.03,219.28) M4.4@1578.92,219.28 ; M4.4@1552.36,250.84 ccw(c1552.36,327.02) 1606.23,273.15 ccw(c1660.1,219.28) M4.4@1583.92,219.28 ; M4.4@1552.36,255.84 ccw(c1552.36,344.09) 1614.77,281.69 ccw(c1677.17,219.28) M4.4@1588.92,219.28 ; M4.4@1552.36,260.84 ccw(c1552.36,361.16) 1623.3,290.22 ccw(c1694.24,219.28) M4.4@1593.92,219.28 ; M4.4@1552.36,265.84 ccw(c1552.36,378.23) 1631.84,298.76 ccw(c1711.31,219.28) M4.4@1598.92,219.28 ; M4.4@1552.36,270.84 ccw(c1552.36,395.3) 1640.37,307.29 ccw(c1728.38,219.28) M4.4@1603.92,219.28 ; M4.4@1552.36,275.84 ccw(c1552.36,412.38) 1648.91,315.83 ccw(c1745.45,219.28) M4.4@1608.92,219.28
JXM_LEL_ADC: C37.1 R24.1 U10.22 | length 2019.2
  TopLayer w5: R24.1 C37.1 1344,844 1765,1265 1765,1774 1915,1924 v1(1915,2192) ; v1@1908.28,2185.28 cw(c1892.06,2169.07) 1915,2169.07 cw(c1937.94,2169.07) v1@1921.72,2185.28
  BottomLayer w5: 1879.99,2241.01 1879.99,2274 ; U10.22 1879.99,2274 ; v1@1905.5,2192 ccw(c1882.56,2192) 1898.78,2208.22 ccw(c1915,2224.43) v1@1915,2201.5 ; v1(1915,2192) 1879.99,2227.01 1879.99,2274
JXM_LEL_RX: M5.5 R37.2 U3.4 | length 2467.7
  BottomLayer w5: R37.2 820,841 1258,1279 U3.4
  BottomLayer w10: R37.2 757.92,821.92 757.92,359 M5.5 ; M5.5@843.58,219.28 ccw(c713.08,219.28) 805.36,311.56 ccw(c897.64,403.84) M5.5@897.64,273.34 ; M5.5@853.58,219.28 ccw(c747.22,219.28) 822.43,294.49 ccw(c897.64,369.7) M5.5@897.64,263.34 ; M5.5@863.58,219.28 ccw(c781.37,219.28) 839.5,277.42 ccw(c897.64,335.56) M5.5@897.64,253.34
JXM_LEL_TX: M5.4 R36.1 U3.11 | length 2794.3
  TopLayer w5: v1@1150.78,1717.72 ccw(c1134.57,1733.93) 1157.5,1733.93 ccw(c1180.43,1733.93) v1@1164.22,1717.72 ; v1@1151.28,2017.28 cw(c1136.27,2002.27) 1157.5,2002.27 ; v1(1157.5,1711) 1157.5,2023.5 v1(1158,2024) ; 1157.5,1999.86 cw(c1182.14,1999.86) v1@1164.72,2017.28 ; 1157.5,2011.93 cw(c1170.07,2011.93) v1@1161.18,2020.82
  BottomLayer w5: R36.1 729.32,841 756.82,868.5 797.5,868.5 1157.5,1228.5 v1(1157.5,1711) ; v1@1150.78,1704.28 cw(c1134.57,1688.07) 1157.5,1688.07 cw(c1180.43,1688.07) v1@1164.22,1704.28
  BottomLayer w10: M5.4 737.92,354.84 737.92,825.08 R36.1 ; M5.4@602.36,253.34 ccw(c602.36,335.56) 660.5,277.42 ccw(c718.63,219.28) M5.4@636.42,219.28 ; M5.4@602.36,263.34 ccw(c602.36,369.7) 677.57,294.49 ccw(c752.78,219.28) M5.4@646.42,219.28 ; M5.4@602.36,273.34 ccw(c602.36,403.84) 694.64,311.56 ccw(c786.92,219.28) M5.4@656.42,219.28 ; v1@1153.05,2028.95 ccw(c1141.1,2040.9) 1158,2040.9 ccw(c1174.9,2040.9) v1@1162.95,2028.95 ; v1(1158,2024) U3.11
JXM_O2_ADC: C31.1 R21.1 U10.20 | length 672.7
  TopLayer w5: v1@2044.28,1902.28 cw(c2028.06,1886.07) 2051,1886.07 cw(c2073.94,1886.07) v1@2057.72,1902.28 ; R21.1 C31.1 v1(2051,1909)
  BottomLayer w5: U10.20 1919.36,2255 2016,2158.36 2016,2027.31 ; 2015.97,2027.28 2015.97,1944.03 v1(2051,1909) ; v1@2041.5,1909 ccw(c2018.56,1909) 2034.78,1925.22 ccw(c2051,1941.43) v1@2051,1918.5
JXM_O2_RX: M2.5 R40.2 U3.1 | length 2058.4
  BottomLayer w5: U3.1 1408,1854 1488,1774 1568,1774 1712,1630 R40.2 1739.5,1543.5 1739.5,1277.42 M2.5 ; M2.5@1791.08,1169.28 ccw(c1654.55,1169.28) 1751.09,1265.83 ccw(c1847.64,1362.38) M2.5@1847.64,1225.84 ; M2.5@1796.08,1169.28 ccw(c1671.62,1169.28) 1759.63,1257.29 ccw(c1847.64,1345.3) M2.5@1847.64,1220.84 ; M2.5@1801.08,1169.28 ccw(c1688.69,1169.28) 1768.16,1248.76 ccw(c1847.64,1328.23) M2.5@1847.64,1215.84 ; M2.5@1806.08,1169.28 ccw(c1705.76,1169.28) 1776.7,1240.22 ccw(c1847.64,1311.16) M2.5@1847.64,1210.84 ; M2.5@1811.08,1169.28 ccw(c1722.83,1169.28) 1785.23,1231.69 ccw(c1847.64,1294.09) M2.5@1847.64,1205.84 ; M2.5@1816.08,1169.28 ccw(c1739.9,1169.28) 1793.77,1223.15 ccw(c1847.64,1277.02) M2.5@1847.64,1200.84 ; M2.5@1821.08,1169.28 ccw(c1756.97,1169.28) 1802.31,1214.62 ccw(c1847.64,1259.95) M2.5@1847.64,1195.84
JXM_O2_TX: M2.4 R33.1 U3.12 | length 2680.4
  TopLayer w5: v1(1244,2024) 1383.38,2024 v1(1383.69,2023.69) ; v1@1250.72,2017.28 cw(c1266.93,2001.07) 1266.93,2024 cw(c1266.93,2046.93) v1@1250.72,2030.72 ; 1360,2024 cw(c1360,2000) v1@1376.97,2016.97 ; 1361.5,2024 ccw(c1361.5,2045.87) v1@1376.97,2030.41
  BottomLayer w5: U3.12 1208,2060 v1(1244,2024) ; v1@1234.5,2024 ccw(c1211.57,2024) 1227.78,2040.22 ccw(c1244,2056.43) v1@1244,2033.5 ; v1@1376.97,2016.97 cw(c1360.75,2000.75) 1383.69,2000.75 cw(c1406.62,2000.75) v1@1390.41,2016.97 ; v1(1383.69,2023.69) 1383.69,1852.04 1383.69,1646.31 1542,1488 1684,1488 R33.1 1724.5,1503.5 1724.5,1341.42 M2.4 ; M2.4@1552.36,1195.84 ccw(c1552.36,1259.95) 1597.69,1214.62 ccw(c1643.03,1169.28) M2.4@1578.92,1169.28 ; M2.4@1552.36,1200.84 ccw(c1552.36,1277.02) 1606.23,1223.15 ccw(c1660.1,1169.28) M2.4@1583.92,1169.28 ; M2.4@1552.36,1205.84 ccw(c1552.36,1294.09) 1614.77,1231.69 ccw(c1677.17,1169.28) M2.4@1588.92,1169.28 ; M2.4@1552.36,1210.84 ccw(c1552.36,1311.16) 1623.3,1240.22 ccw(c1694.24,1169.28) M2.4@1593.92,1169.28 ; M2.4@1552.36,1215.84 ccw(c1552.36,1328.23) 1631.84,1248.76 ccw(c1711.31,1169.28) M2.4@1598.92,1169.28 ; M2.4@1552.36,1220.84 ccw(c1552.36,1345.3) 1640.37,1257.29 ccw(c1728.38,1169.28) M2.4@1603.92,1169.28 ; M2.4@1552.36,1225.84 ccw(c1552.36,1362.38) 1648.91,1265.83 ccw(c1745.45,1169.28) M2.4@1608.92,1169.28
JXM_RX: R32.1 U3.3 U10.43 | length 915.4
  BottomLayer w5: U3.3 1308,2024.31 1333.69,2050 1333.69,2133.04 1325.5,2141.23 1325.5,2296.18 1353,2323.68 R32.1 1353,2480.7 1505.88,2633.58 U10.43
JXM_S0: U3.10 U10.44 | length 812.9
  BottomLayer w9: U3.10 1108,2259.74 1501.52,2653.26 U10.44
JXM_S1: U3.9 U10.45 | length 857.5
  BottomLayer w9: U3.9 1058,2236.61 1494.34,2672.95 U10.45
JXM_TX: R31.1 U3.13 U10.42 | length 907.7
  TopLayer w5: v1(1258,2172) v1(1353,2172) ; v1@1264.72,2165.28 cw(c1280.93,2149.07) 1280.93,2172 cw(c1280.93,2194.93) v1@1264.72,2178.72 ; v1@1346.28,2165.28 ccw(c1330.07,2149.07) 1330.07,2172 ccw(c1330.07,2194.93) v1@1346.28,2178.72
  BottomLayer w5: v1@1251.28,2165.28 cw(c1235.07,2149.07) 1258,2149.07 cw(c1280.93,2149.07) v1@1264.72,2165.28 ; U3.13 v1(1258,2172) ; v1@1346.28,2178.72 ccw(c1330.07,2194.93) 1353,2194.93 ccw(c1375.93,2194.93) v1@1359.72,2178.72 ; v1(1353,2172) R31.1 1380.5,2303.5 1380.5,2486.99 1507.41,2613.89 U10.42
M0: M1.1 U10.33 | length 692.5
  BottomLayer w9: M1.1 1645.14,2087.14 1645.14,2330 1645.14,2425 1633.42,2436.73 U10.33 ; M1.1@1558,2016.87 ccw(c1558,2057.6) 1586.8,2028.8 ; M1.1@1558,2025.87 ccw(c1558,2088.33) 1602.16,2044.16 ; M1.1@1558,2034.87 ccw(c1558,2119.05) 1617.53,2059.53 ; M1.1@1583.03,2009.84 cw(c1619.69,2009.84) 1593.76,2035.76
M1: M1.2 U10.34 | length 686.3
  BottomLayer w9: U10.34 1640.6,2456.41 1664.14,2432.87 1664.14,2006.14 M1.2 ; M1.2@1640.3,2027.54 ccw(c1582.75,2085.09) 1664.14,2085.09 ; M1.2@1646.67,2021.18 ccw(c1604.48,2063.37) 1664.14,2063.37 ; M1.2@1653.03,2014.81 ccw(c1626.2,2041.64) 1664.14,2041.64 ; 1664.14,2055.43 ccw(c1703.59,2055.43) M1.2@1675.7,2027.54
MCU_LED: C7.2 HL1.K U10.50 | length 196.7
  BottomLayer w5: U10.50 1702.83,2957.83 HL1.K ; C7.2 C7.2@1703.17,3016.83
  BottomLayer w10: HL1.K C7.2
NetC7_1: C7.1 HL1.A R2.2 | length 121
  BottomLayer w10: HL1.A C7.1 R2.2
NetC27_1: C27.1 HL2.A R12.2 | length 137
  TopLayer w10: R12.2 C27.1 HL2.A
NetJP2_1: JP2.1 R4.1 | length 457.2
  BottomLayer w5: R4.1 2410.57,2360.43 JP2.1 ; JP2.1@2520.89,2341.31 ccw(c2474.75,2295.18) 2474.75,2360.43 ccw(c2474.75,2425.68) JP2.1@2520.89,2379.54 ; JP2.1@2524.42,2344.85 ccw(c2486.82,2307.25) 2486.82,2360.43 ccw(c2486.82,2413.6) JP2.1@2524.42,2376 ; JP2.1@2527.96,2348.38 ccw(c2498.89,2319.32) 2498.89,2360.43 ccw(c2498.89,2401.53) JP2.1@2527.96,2372.47
NetM2_1: M2.1 R21.2 | length 1639
  TopLayer w5: M2.1@1866.42,1661.94 cw(c1911.75,1616.61) 1911.75,1680.72 cw(c1911.75,1744.83) M2.1@1866.42,1699.49 ; M2.1@1869.95,1658.4 cw(c1923.82,1604.54) 1923.82,1680.72 cw(c1923.82,1756.9) M2.1@1869.95,1703.03 ; M2.1@1873.49,1654.87 cw(c1935.89,1592.46) 1935.89,1680.72 cw(c1935.89,1768.97) M2.1@1873.49,1706.56 ; M2.1@1877.02,1651.33 cw(c1947.96,1580.39) 1947.96,1680.72 cw(c1947.96,1781.04) M2.1@1877.02,1710.1 ; M2.1@1880.56,1647.8 cw(c1960.03,1568.32) 1960.03,1680.72 cw(c1960.03,1793.11) M2.1@1880.56,1713.64 ; M2.1@1884.09,1644.26 cw(c1972.1,1556.25) 1972.1,1680.72 cw(c1972.1,1805.18) M2.1@1884.09,1717.17 ; M2.1@1887.63,1640.73 cw(c1984.17,1544.18) 1984.17,1680.72 cw(c1984.17,1817.25) M2.1@1887.63,1720.71 ; M2.1@1892.39,1667.87 cw(c1909.44,1662.97) 1909.44,1680.72 cw(c1909.44,1698.46) M2.1@1892.39,1693.56 ; M2.1@1897.19,1666.49 cw(c1916.08,1661.07) 1916.08,1680.72 cw(c1916.08,1700.36) M2.1@1897.19,1694.94 ; M2.1@1902,1665.11 cw(c1922.71,1659.16) 1922.71,1680.72 ; M2.1@1902,1696.32 ccw(c1922.71,1702.27) 1922.71,1680.72 ; R21.2 1984.72,1680.72 M2.1 1922.72,1680.72
NetM3_1: M3.1 R22.2 | length 1263.5
  TopLayer w5: M3.1 987.92,1771 ; M3.1@898.93,1707.24 ccw(c901.57,1761.57) 940.03,1723.11 ccw(c978.49,1684.65) M3.1@924.16,1682.01 ; M3.1@899.17,1712.23 ccw(c902.31,1776.79) 948.01,1731.09 ccw(c993.71,1685.39) M3.1@929.16,1682.25 ; M3.1@899.41,1717.23 ccw(c903.05,1792.01) 955.99,1739.07 ccw(c1008.93,1686.13) M3.1@934.15,1682.49 ; M3.1@899.66,1722.22 ccw(c903.79,1807.24) 963.97,1747.05 ccw(c1024.16,1686.87) M3.1@939.14,1682.73 ; M3.1@899.9,1727.22 ccw(c904.53,1822.46) 971.95,1755.03 ccw(c1039.38,1687.61) M3.1@944.14,1682.98 ; M3.1@900.14,1732.21 ccw(c905.27,1837.68) 979.94,1763.01 ccw(c1054.6,1688.35) M3.1@949.13,1683.22 ; M3.1@900.38,1737.2 ccw(c906.01,1852.91) 987.92,1771 ; M3.1@954.13,1683.46 cw(c1069.83,1689.09) 987.92,1771 ; R22.2 987.92,1771
NetM4_1: M4.1 R23.2 | length 1383.4
  TopLayer w5: M4.1 1960.92,844 R23.2 ; M4.1@1847.64,757.27 ccw(c1847.64,821.38) 1892.97,776.05 ccw(c1938.3,730.72) M4.1@1874.19,730.72 ; M4.1@1847.64,762.27 ccw(c1847.64,838.45) 1901.51,784.58 ccw(c1955.37,730.72) M4.1@1879.19,730.72 ; M4.1@1847.64,767.27 ccw(c1847.64,855.52) 1910.04,793.12 ccw(c1972.44,730.72) M4.1@1884.19,730.72 ; M4.1@1847.64,772.27 ccw(c1847.64,872.59) 1918.58,801.66 ccw(c1989.52,730.72) M4.1@1889.19,730.72 ; M4.1@1847.64,777.27 ccw(c1847.64,889.67) 1927.11,810.19 ccw(c2006.59,730.72) M4.1@1894.19,730.72 ; M4.1@1847.64,782.27 ccw(c1847.64,906.74) 1935.65,818.73 ccw(c2023.66,730.72) M4.1@1899.19,730.72 ; M4.1@1847.64,787.27 ccw(c1847.64,923.81) 1944.18,827.26 ccw(c2040.73,730.72) M4.1@1904.19,730.72
NetM5_1: M5.1 R24.2 | length 1382.4
  TopLayer w5: M5.1 1010.92,844 R24.2 ; M5.1@897.64,757.27 ccw(c897.64,821.38) 942.97,776.05 ccw(c988.3,730.72) M5.1@924.19,730.72 ; M5.1@897.64,762.27 ccw(c897.64,838.45) 951.51,784.58 ccw(c1005.37,730.72) M5.1@929.19,730.72 ; M5.1@897.64,767.27 ccw(c897.64,855.52) 960.04,793.12 ccw(c1022.44,730.72) M5.1@934.19,730.72 ; M5.1@897.64,772.27 ccw(c897.64,872.59) 968.58,801.66 ccw(c1039.52,730.72) M5.1@939.19,730.72 ; M5.1@897.64,777.27 ccw(c897.64,889.67) 977.11,810.19 ccw(c1056.59,730.72) M5.1@944.19,730.72 ; M5.1@897.64,782.27 ccw(c897.64,906.74) 985.65,818.73 ccw(c1073.66,730.72) M5.1@949.19,730.72 ; M5.1@897.64,787.27 ccw(c897.64,923.81) 994.18,827.26 ccw(c1090.73,730.72) M5.1@954.19,730.72
OSC_IN: C9.2 G1.1 R7.1 U10.5 | length 419.1
  BottomLayer w5: U10.5 2171.26,2653.26 R7.1 2195.87,2666.13 2289.15,2666.13 2341.02,2718 G1.1 2327,2736 C9.2
OSC_OUT: C10.1 G1.3 R7.2 U10.6 | length 319.7
  BottomLayer w5: U10.6 2173.42,2633.58 R7.2 2232.7,2574.3 G1.3 2274,2558.68 C10.1
RESET: C8.1 R3.1 R4.2 U10.7 VD7.A | length 528.3
  BottomLayer w5: U10.7@2106.23,2613.89 U10.7 2129.11,2613.89 C8.1 2246,2497 R3.1 ; 2246,2442 R3.1 ; VD7.A 2334,2382 R4.2 R3.1
SWCLK: JP2.2 R5.1 U10.49 | length 1427.1
  TopLayer w5: v1(2196,2723) R5.1 2401,2597.85 JP2.2 ; v1@2202.72,2716.28 cw(c2218.94,2700.07) 2218.94,2723 cw(c2218.94,2745.93) v1@2202.72,2729.72 ; JP2.2@2512.97,2458.85 ccw(c2447.72,2458.85) 2493.86,2504.99 ccw(c2540,2551.13) JP2.2@2540,2485.88 ; JP2.2@2517.97,2458.85 ccw(c2464.79,2458.85) 2502.4,2496.45 ccw(c2540,2534.06) JP2.2@2540,2480.88 ; JP2.2@2522.97,2458.85 ccw(c2481.86,2458.85) 2510.93,2487.92 ccw(c2540,2516.99) JP2.2@2540,2475.88
  BottomLayer w5: U10.49 1683.14,2778.86 1695,2767 2152,2767 v1(2196,2723) ; v1@2186.5,2723 ccw(c2163.56,2723) 2179.78,2739.22 ccw(c2196,2755.43) v1@2196,2732.5
SWDIO: JP2.4 R6.1 U10.46 | length 1409.2
  TopLayer w5: v1(2154,2723) 2209,2778 R6.1 2428.5,2750.5 2428.5,2697.5 2470.3,2655.7 JP2.4 ; v1@2154,2732.5 ccw(c2154,2755.43) 2170.22,2739.22 ccw(c2186.44,2723) v1@2163.5,2723 ; JP2.4@2520.89,2636.59 ccw(c2474.75,2590.45) 2474.75,2655.7 ccw(c2474.75,2720.95) JP2.4@2520.89,2674.81 ; JP2.4@2524.42,2640.13 ccw(c2486.82,2602.52) 2486.82,2655.7 ccw(c2486.82,2708.88) JP2.4@2524.42,2671.28 ; JP2.4@2527.96,2643.66 ccw(c2498.89,2614.59) 2498.89,2655.7 ccw(c2498.89,2696.81) JP2.4@2527.96,2667.74
  BottomLayer w5: U10.46 1641.63,2692.63 1701,2752 2125,2752 v1(2154,2723) ; v1@2144.5,2723 ccw(c2121.56,2723) 2137.78,2739.22 ccw(c2154,2755.43) v1@2154,2732.5
V_LOAD: C21.1 C22.2 R19.1 U1.1 VD1.K VD2.K | length 1780.5
  TopLayer w10: C22.2 v1(572,2090) ; v1@899.05,2853.05 cw(c887.1,2841.1) 904,2841.1 cw(c920.9,2841.1) v1@908.95,2853.05 ; R19.1 v1(904,2858) ; 555.1,2090 ccw(c555.1,2106.9) 567.05,2094.95 cw(c555.1,2106.9) 555.1,2090 ; 555.1,2090 cw(c555.1,2073.1) 567.05,2085.05 ccw(c555.1,2073.1) 555.1,2090
  TopLayer w30: C21.1 C22.2 U1.1
  TopLayer w50: VD1.K VD2.K 427.77,2090.23 C21.1
  BottomLayer w10: v1(572,2090) 572,2526 v1(904,2858) ; v1@897,2858 cw(c880.1,2858) 892.05,2846.05 cw(c904,2834.1) v1@904,2851 ; 572,2106.9 ccw(c588.9,2106.9) 576.95,2094.95 cw(c588.9,2106.9) 572,2106.9 ; 572,2106.9 cw(c555.1,2106.9) 567.05,2094.95 ccw(c555.1,2106.9) 572,2106.9
V_LOAD_ON: K1.1 VD1.A | length 226.8
  TopLayer w50: K1.1 278,2450 VD1.A
pads on no net: K1.0 K1.3 U2.4 U10.2 U10.3 U10.4 U10.8 U10.9 U10.10 U10.11 U10.14 U10.15 U10.16 U10.17 U10.25 U10.26 U10.27 U10.35 U10.36 U10.37 U10.38 U10.39 U10.40 U10.41 U10.51 U10.52 U10.53 U10.54 U10.55 U10.56 U10.57 U10.58 U10.59 U10.61 U10.62

## Polygon pours and split planes (outlines as drawn)
DGND on BottomLayer "BottomLayer-No Net" (solid, remove dead copper, pour order 1000): 135,20 2525,20 2610,105 2610,3260 2525,3345 115,3345 20,3250 20,110
DGND on TopLayer "BottomLayer-No Net" (solid, remove dead copper, pour order 1001): 135,20 2525,20 2610,105 2610,3260 2525,3345 115,3345 20,3250 20,110

## Keep-outs
TopLayer:
  circle w5: c454,3213 r55
  circle w5: c2492,2941 r55
  circle w5: c2450,443 r55
  circle w5: c166,448 r55
BottomLayer:
  circle w5: c454,3213 r55
  circle w5: c2492,2941 r55
  circle w5: c2450,443 r55
  circle w5: c166,448 r55
KeepOutLayer:
  lines w5: 0,3226.2 0,137.8 ccw(c137.8,137.8) 140.05,0.02 615,0 2492,0 ccw(c2492,137.79) 2629.79,137.79 2631.07,3231 ; 0.2,3226.2 cw(c138,3226.2) 138,3364 ; 138,3364.17 2498.99,3364.08 ; 2497.99,3364.01 cw(c2497.99,3231) 2631,3231

## Silkscreen, mask and mechanical layers (free items; w line width, h text height)
TopOverlay:
  circle w10: c2454,3185 r157.48
  circle w10: c183,3182 r157.48
  circle w10: c2450.68,175.01 r157.48
  circle w10: c187.01,187.01 r157.48
  text "V" at 2580,2805 h60 r90
  text "D" at 2482,2640 h60 r90
  text "G" at 2479,2545 h60 r90
  text "C" at 2482,2441 h60 r90
  text "R" at 2572,2271 h60 r90
  text "B+" at 30,2137 h60 r270
  text "B-" at 30,1978 h60 r270
  text "ADC" at 1740,1772 h60
  text "ADC" at 799,1767 h60
  text "+5V" at 1464,1764 h60
  text "+5V" at 531,1763 h60
  text "GND" at 377,1511 h60
  text "GND" at 1327,1508 h60
  text "TX" at 852,1030 h60
  text "RX" at 554,1028 h60
  text "RX" at 1505,1027 h60
  text "TX" at 1795,1026 h60
  text "ADC" at 787,831 h60
  text "+5V" at 1469.16,819 h60
  text "ADC" at 1742,819 h60
  text "+5V" at 510,817 h60
  text "GND" at 370,553 h60
  text "GND" at 1324,553 h60
  text "RX" at 552,78 h60
  text "TX" at 848,77 h60
  text "RX" at 1508,71 h60
  text "TX" at 1803,69 h60
BottomOverlay:
  circle w10: c2454,3185 r157.48
  circle w10: c183,3182 r157.48
  circle w10: c187.01,187.01 r157.48
  circle w10: c2450.68,175.01 r157.48
  text "V" at 2580,2845 h60 r90
  text "D" at 2482,2680 h60 r90
  text "G" at 2478,2586 h60 r90
  text "C" at 2484,2482 h60 r90
  text "ON" at 204,2431 h60 r270
  text "R" at 2573,2308 h60 r90
  text "OFF" at 199,2196 h60 r270
  text "+5V" at 1478,1654 h60
  text "+5V" at 523,1650 h60
  text "ADC" at 2082,1645 h60
  text "ADC" at 1138,1643 h60
  text "GND" at 1478,1289 h60
  text "GND" at 523,1287 h60
  text "RX" at 1607,1032 h60
  text "TX" at 954,1030 h60
  text "RX" at 649,1028 h60
  text "TX" at 1897,1026 h60
  text "+5V" at 521,703 h60
  text "+5V" at 1468,701 h60
  text "ADC" at 2091,699 h60
  text "ADC" at 1140,694 h60
  text "GND" at 1478,336 h60
  text "GND" at 525,333 h60
  text "RX" at 651,79 h60
  text "TX" at 947,77 h60
  text "RX" at 1609,72 h60
  text "TX" at 1906,70 h60

## Text inside footprints (layer, text, board x,y; h text height)
M1: TopOverlay "GND" at 2167,2059 h30 r90; TopOverlay "VCC" at 2070,2061 h30 r90; TopOverlay "AUX" at 1965,2056 h30 r90; TopOverlay "TXD" at 1866,2053.87 h30 r90; TopOverlay "RXD" at 1768,2055 h30 r90; TopOverlay "M0" at 1567,2058 h30 r90; TopOverlay "ANT" at 2098,3200 h30 r90; TopOverlay "GND" at 1579,3132 h30 r90; TopOverlay "GND" at 1675,3134 h30 r90; TopOverlay "GND" at 1778,3136 h30 r90